# Altium PCB mainpcb.PcbDoc
Units mil, origin at the board's own origin, x right, y up, seen from the top; angles counter-clockwise.
Board outline 3937 x 1900 mil, 2 copper layers (Top Layer, Bottom Layer); 44 components, 53 nets, 370 pads, 5 vias.
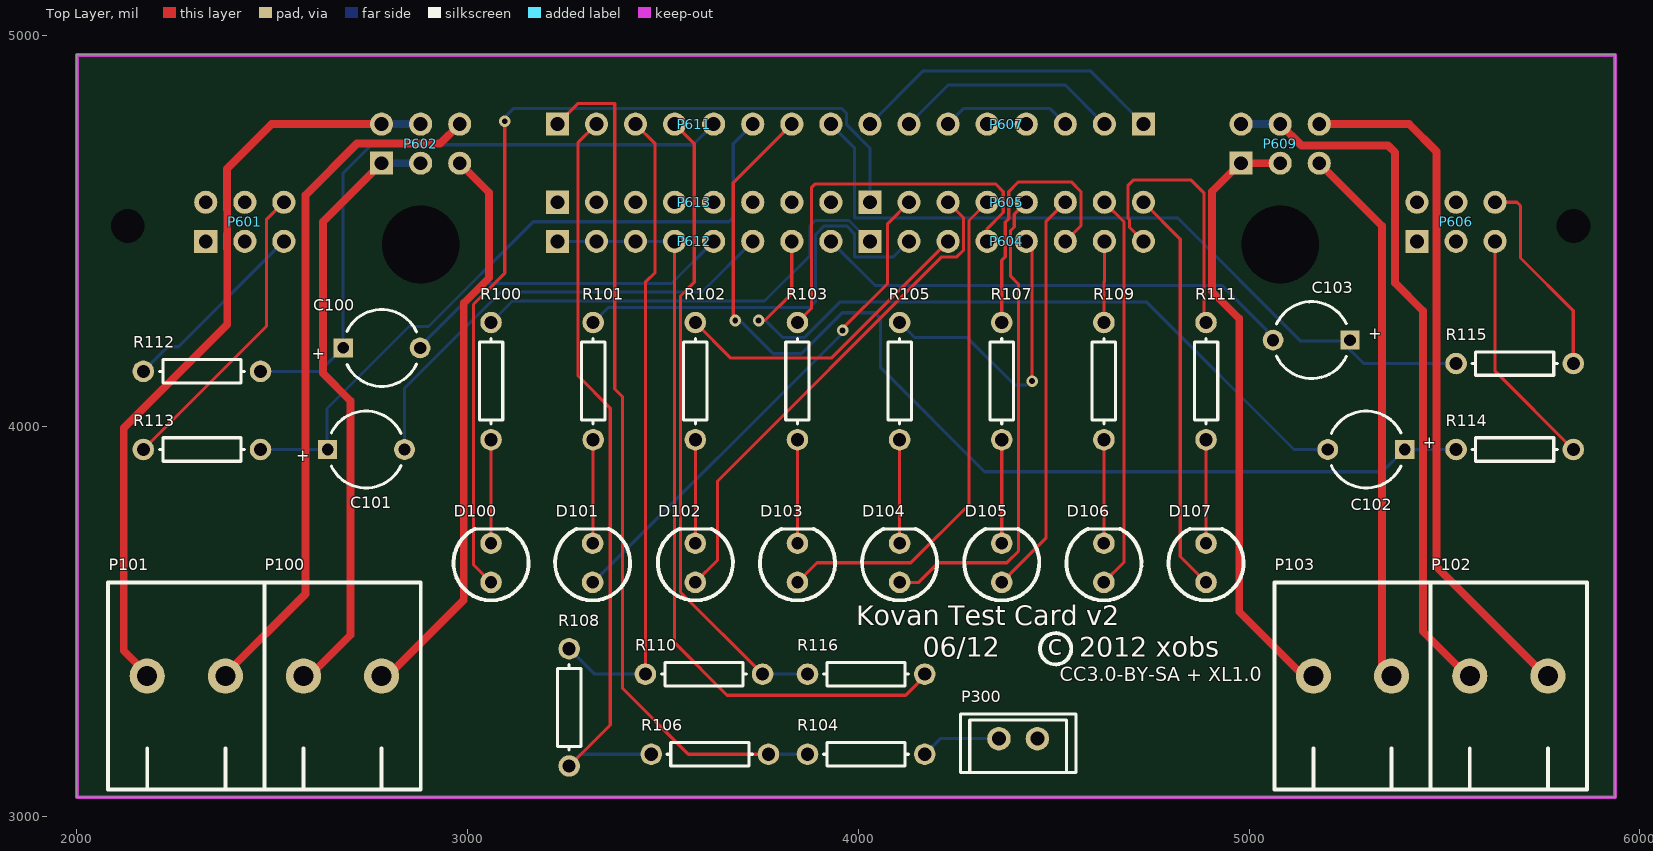
[diagram p0: Top Layer view]
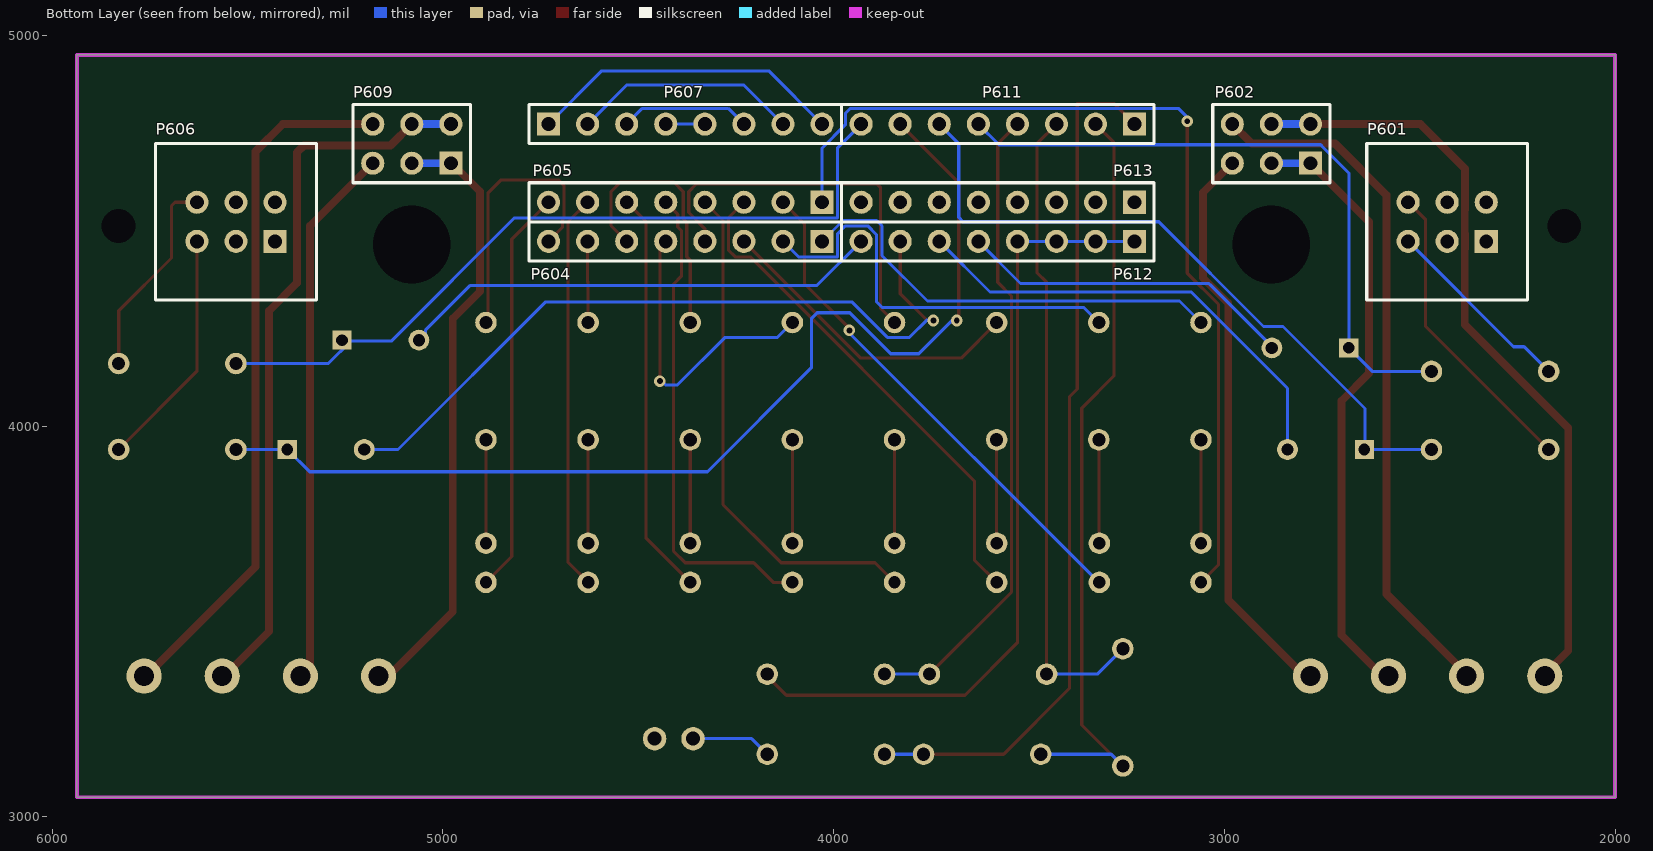
[diagram p1: Bottom Layer view, seen from below]

## Layer stack, top to bottom
Top Layer: signal copper 1.4
Dielectric: dielectric 12.6, FR-4, Dk 4.8
Bottom Layer: signal copper 1.4

## Board outline
2000,3050 5937,3050 5937,4950 2000,4950

## Design rules (kind name [scope] priority, off if disabled: settings)
Clearance [All] p1: gap=6
ComponentClearance [All] p1 off: gap=10 collisioncheckmode=3 verticalgap=10 showdistances=FALSE
HoleSize [All] p1: absolutevalues=TRUE maxlimit=300 minlimit=1 maxpercent=80.000 minpercent=20.000
PolygonConnect [All] p1: connectstyle=Relief reliefconductorwidth=10 reliefentries=4 polygonreliefangle="90 Angle"
RoomDefinition testboard [InComponentClass('testboard')] p1 off: confinementstyle=ConfineIn formatcopy=TRUE lockcomponents=FALSE outline 5980,3875 19270,3875 19270,3880 5980,3880
RoutingVias [All] p1: holewidth=15 width=30 viastyle="Through Hole" minholewidth=15 minwidth=30 maxholewidth=15 maxwidth=30
SilkscreenOverComponentPads [All] p1: minsilkscreentomaskgap=2
SolderMaskExpansion [All] p1: expansion=4
Width [All] p1: maxlimit=100 minlimit=6 preferedwidth=8
25 further rules are at their usual default settings.

## Components (designator, comment, footprint, x,y, rotation, side; value= is the part's Value field where it differs from the comment)
C100 "100uF" CAPPR5-5x5 2780,4200 r0 top
C101 "100uF" CAPPR5-5x5 2740,3940 r0 top
C102 "100uF" CAPPR5-5x5 5300,3940 r180 top
C103 "100uF" CAPPR5-5x5 5160,4220 r180 top
D100 "LED1" TLHG520 3060,3600 r90 top
D101 "LED1" TLHG520 3320,3600 r90 top
D102 "LED1" TLHG520 3582.86,3600 r90 top
D103 "LED1" TLHG520 3844.29,3600 r90 top
D104 "LED1" TLHG520 4105.71,3600 r90 top
D105 "LED1" TLHG520 4367.14,3600 r90 top
D106 "LED1" TLHG520 4628.57,3600 r90 top
D107 "LED1" TLHG520 4890,3600 r90 top
P100 "Motor 1" weidmuller_1716060000 2580,3360 r0 top
P101 "Motor 2" weidmuller_1716060000 2180,3360 r0 top
P102 "Motor 3" weidmuller_1716060000 5565,3360 r0 top
P103 "Motor 4" weidmuller_1716060000 5165,3360 r0 top
P300 "JST B2B-EH-A (Speaker)" JST_B2B_EH_A 4360,3200 r0 top
P601 "Fully Shrouded 3x2 header (Servo1)" HEADER2X3_SHROUDED 2329.8,4472.76 r0 top
P602 "3M 960206-6202-AR Header 3X2" HDR2X3 2779.8,4672.76 r0 top
P604 "Header 8 (VDD)" HDR1X8 4029.8,4472.76 r0 top
P605 "Header 8 (Ground 2)" HDR1X8 4029.8,4572.76 r0 top
P606 "Fully Shrouded 3x2 header (Servo2)" HEADER2X3_SHROUDED 5429.8,4472.76 r0 top
P607 "Header 8 (Digital)" HDR1X8 4729.8,4772.76 r180 top
P609 "3M 960206-6202-AR Header 3X2" HDR2X3 4979.8,4672.76 r0 top
P611 "Header 8 (Analog)" HDR1X8 3229.8,4772.76 r0 top
P612 "Header 8 (GND ANA)" HDR1X8 3229.8,4472.76 r0 top
P613 "Header 8 (VANA)" HDR1X8 3229.8,4572.76 r0 top
R100 "1K" AXIAL-0.3 3060,4115 r90 top
R101 "1K" AXIAL-0.3 3321.43,4115 r90 top
R102 "1K" AXIAL-0.3 3582.86,4115 r90 top
R103 "1K" AXIAL-0.3 3844.29,4115 r90 top
R104 "2.2K" AXIAL-0.3 4020,3160 r0 top
R105 "1K" AXIAL-0.3 4105.71,4115 r90 top
R106 "1K" AXIAL-0.3 3620,3160 r0 top
R107 "1K" AXIAL-0.3 4367.14,4115 r90 top
R108 "1K" AXIAL-0.3 3260,3280 r270 top
R109 "1K" AXIAL-0.3 4628.57,4115 r90 top
R110 "1K" AXIAL-0.3 3605,3365 r180 top
R111 "1K" AXIAL-0.3 4890,4115 r90 top
R112 "1K" AXIAL-0.3 2320,4140 r0 top
R113 "1K" AXIAL-0.3 2320,3940 r0 top
R114 "1K" AXIAL-0.3 5680,3940 r180 top
R115 "1K" AXIAL-0.3 5680,4160 r180 top
R116 "1.5K" AXIAL-0.3 4020,3365 r0 top

## Footprints (in the part's own frame and the unit in brackets; to place one, negate y for a bottom-side part, rotate by r counter-clockwise, add the part's x,y. Pads: shape width x height; smd on the part's side, far side on the other; paste and mask are expansions set on the pad)
AXIAL-0.3 [mm] "Axial Device, Thru-Hole; 2 Leads; 0.3 in Pin Spacing"
  round 1.4 hole 0.85: 1(-3.81,0) 2(3.81,0)
  silkscreen extent -2.77,-0.76 2.77,0.76
CAPPR5-5x5 [mm] "Capacitor, Electrolytic, Radial; Body 5 x 5 mm (Dia.xH typ); Pin Spacing 5 mm (typ)"
  rect 1.25x1.25 hole 0.75: 1(-2.5,0)
  round 1.35 hole 0.8: 2(2.5,0)
  silkscreen extent -2.26,-2.5 2.27,2.5
HDR1X8 [mm] "Connector; Header; 8 Position"
  rect 1.5x1.5 hole 0.9: 1(0,0)
  round 1.5 hole 0.9: 2(2.54,0) 3(5.08,0) 4(7.62,0) 5(10.16,0) 6(12.7,0) 7(15.24,0) 8(17.78,0)
HDR2X3 [mm] "Connector; Header; 3x2 Position"
  rect 1.5x1.5 hole 0.9: 1(0,0)
  round 1.5 hole 0.9: 2(0,2.54) 3(2.54,0) 4(2.54,2.54) 5(5.08,0) 6(5.08,2.54)
HEADER2X3_SHROUDED [mm] "2x3 0.1\" pin header, shrouded"
  rect 1.5x1.5 hole 0.9: 1(0,0)
  round 1.5 hole 0.9: 2(0,2.54) 3(2.54,0) 4(2.54,2.54) 5(5.08,0) 6(5.08,2.54)
JST_B2B_EH_A [mil] "2-pin 2.5mm low cost connector"
  round 60 hole 35.43: 1(0,0) 2(98.43,0)
  silkscreen extent -98,-87 197,63, body extent -98,-87 197,63, height 236
TLHG520 [mm]
  round 1.4 hole 0.8: 1(0,0) 2(2.54,0)
  silkscreen extent -1.17,-2.44 3.48,2.44
weidmuller_1716060000 [mil]
  round 90 hole 51.18: 1(0,0) 2(200,0)
  silkscreen extent -100,-290 300,240

## Part data
C100 C101 C102 C103: library part Cap, "Capacitor"
D100 D101 D102 D103 D104 D105 D106 D107: "Typical RED GaAs LED"
P100 P101 P102 P103 P300: library part "Header 2", "Header, 2-Pin"
P601 P602 P606 P609: library part "Header 3X2", "Header, 3-Pin, Dual row"
P604 P605 P607 P611 P612 P613: library part "Header 8", "Header, 8-Pin"
R100 R101 R102 R103 R104 R105 R106 R107 R108 R109 R110 R111 R112 R113 R114 R115 R116: library part Res1, "Resistor"

## Free pads (board coordinates)
  round 78.74 hole 86.61 unplated mask+59.06: 0(2130,4512.13) 0(5830.79,4512.13)
  round 55.12 hole 199 unplated: 0(2880,4465) 1(5080,4465)
  rect 100x2 on Top Overlay: 1(4726,3167) 1(4726,3169) 1(4726,3171) 1(4726,3173) 1(4726,3175) 1(4726,3177) 1(4726,3179) 1(4726,3181) 1(4726,3183) 1(4726,3185) 1(4726,3187) 1(4726,3189) 1(4730,3197) 1(4900,3197) 1(4904,3165) 1(4904,3167) 1(4904,3169) 1(4904,3171) 1(4904,3173) 1(4904,3181) 1(4904,3183) 1(4904,3185) 1(4904,3187) 1(4904,3189)
  rect 102x2 on Top Overlay: 1(4727,3161) 1(4727,3163) 1(4727,3165) 1(4727,3191) 1(4727,3193) 1(4729,3159) 1(4901,3159) 1(4903,3161) 1(4903,3163) 1(4903,3191) 1(4903,3193) 1(4903,3195)
  rect 104x2 on Top Overlay: 1(4728,3195)
  rect 4x2 on Top Overlay: 1(4730,3287) 1(4772,3081) 1(4858,3081) 1(4900,3287)
  rect 6x2 on Top Overlay: 1(4731,3069) 1(4899,3069)
  rect 10x2 on Top Overlay: 1(4731,3071) 1(4731,3285) 1(4771,3083) 1(4859,3083) 1(4899,3071) 1(4899,3285)
  rect 14x2 on Top Overlay: 1(4731,3283) 1(4769,3085) 1(4861,3085) 1(4899,3073) 1(4899,3283)
  rect 16x2 on Top Overlay: 1(4732,3073)
  rect 20x2 on Top Overlay: 1(4732,3075) 1(4732,3281) 1(4898,3075)
  rect 24x2 on Top Overlay: 1(4732,3279) 1(4898,3077) 1(4898,3279)
  rect 26x2 on Top Overlay: 1(4733,3077)
  rect 30x2 on Top Overlay: 1(4733,3079) 1(4733,3277) 1(4897,3079)
  rect 34x2 on Top Overlay: 1(4733,3081) 1(4733,3275) 1(4815,3317) 1(4897,3081) 1(4897,3275)
  rect 38x2 on Top Overlay: 1(4733,3273) 1(4815,3311) 1(4815,3313) 1(4815,3315) 1(4897,3273)
  rect 40x2 on Top Overlay: 1(4734,3083) 1(4816,3309) 1(4896,3083)
  rect 44x2 on Top Overlay: 1(4734,3085) 1(4734,3271) 1(4816,3297) 1(4896,3085) 1(4896,3271)
  rect 92x2 on Top Overlay: 1(4734,3157) 1(4866,3217) 1(4896,3157)
  rect 48x2 on Top Overlay: 1(4734,3269) 1(4816,3287) 1(4896,3269)
  rect 90x2 on Top Overlay: 1(4737,3199) 1(4765,3217) 1(4895,3199)
  rect 84x2 on Top Overlay: 1(4740,3155) 1(4760,3215) 1(4870,3215) 1(4890,3155)
  rect 72x2 on Top Overlay: 1(4742,3091) 1(4746,3101) 1(4748,3103) 1(4748,3105) 1(4748,3203) 1(4750,3107) 1(4750,3149) 1(4750,3151) 1(4750,3205) 1(4752,3207) 1(4758,3127) 1(4758,3129) 1(4872,3127) 1(4872,3129) 1(4880,3149) 1(4880,3205) 1(4882,3105) 1(4882,3151) 1(4882,3203) 1(4884,3101) 1(4888,3091)
  rect 76x2 on Top Overlay: 1(4742,3093) 1(4752,3147) 1(4754,3145) 1(4754,3211) 1(4758,3133) 1(4758,3135) 1(4872,3133) 1(4872,3135) 1(4876,3145) 1(4876,3211) 1(4888,3093)
  rect 80x2 on Top Overlay: 1(4742,3201) 1(4758,3137) 1(4758,3139) 1(4758,3141) 1(4872,3137) 1(4872,3139) 1(4874,3141) 1(4888,3201)
  rect 70x2 on Top Overlay: 1(4743,3089) 1(4751,3109) 1(4751,3111) 1(4753,3113) 1(4755,3117) 1(4875,3117) 1(4877,3113) 1(4879,3109) 1(4879,3111) 1(4881,3107) 1(4887,3089)
  rect 74x2 on Top Overlay: 1(4743,3095) 1(4745,3097) 1(4745,3099) 1(4747,3153) 1(4753,3209) 1(4759,3131) 1(4873,3131) 1(4877,3209) 1(4879,3147) 1(4879,3207) 1(4883,3103) 1(4883,3153) 1(4885,3099) 1(4887,3095) 1(4887,3097)
  rect 68x2 on Top Overlay: 1(4744,3087) 1(4754,3115) 1(4756,3119) 1(4758,3121) 1(4758,3123) 1(4758,3125) 1(4816,3275) 1(4872,3123) 1(4872,3125) 1(4874,3119) 1(4876,3115)
  rect 78x2 on Top Overlay: 1(4755,3143) 1(4757,3213) 1(4815,3273) 1(4873,3213) 1(4875,3143)
  rect 190x2 on Top Overlay: 1(4815,3219) 1(4815,3221) 1(4815,3239)
  rect 186x2 on Top Overlay: 1(4815,3223) 1(4815,3225) 1(4815,3237)
  rect 182x2 on Top Overlay: 1(4815,3227) 1(4815,3229) 1(4815,3231) 1(4815,3233)
  rect 194x2 on Top Overlay: 1(4815,3243)
  rect 198x2 on Top Overlay: 1(4815,3245)
  rect 202x2 on Top Overlay: 1(4815,3249)
  rect 206x2 on Top Overlay: 1(4815,3251)
  rect 210x2 on Top Overlay: 1(4815,3253) 1(4815,3255)
  rect 214x2 on Top Overlay: 1(4815,3257) 1(4815,3267)
  rect 218x2 on Top Overlay: 1(4815,3259) 1(4815,3261) 1(4815,3265)
  rect 222x2 on Top Overlay: 1(4815,3263)
  rect 98x2 on Top Overlay: 1(4815,3269) 1(4905,3175) 1(4905,3177) 1(4905,3179)
  rect 86x2 on Top Overlay: 1(4815,3271)
  rect 58x2 on Top Overlay: 1(4815,3277)
  rect 50x2 on Top Overlay: 1(4815,3279) 1(4815,3281) 1(4815,3283) 1(4815,3285)
  rect 46x2 on Top Overlay: 1(4815,3289) 1(4815,3291) 1(4815,3293) 1(4815,3295)
  rect 42x2 on Top Overlay: 1(4815,3299) 1(4815,3301) 1(4815,3303) 1(4815,3305) 1(4815,3307)
  rect 184x2 on Top Overlay: 1(4816,3235)
  rect 192x2 on Top Overlay: 1(4816,3241)
  rect 200x2 on Top Overlay: 1(4816,3247)
  rect 66x2 on Top Overlay: 1(4873,3121) 1(4887,3087)
  rect 28x2 on Top Overlay: 1(4898,3277)
  rect 18x2 on Top Overlay: 1(4899,3281)

## Via types
v1: diameter 30, hole 15, Top Layer to Bottom Layer, 5 vias

## Nets (pads, with @x,y where several pads share a name; then routed paths per layer and width w, separated by ;. In a path a pad name is that pad's centre, name@x,y a point inside that pad or via, vN(x,y) a via of type N, cw(c..) or ccw(c..) an arc to the next point about the centre after c; other vN are vias at no path point)
ANA_GND_4: C100.2 P612.5 | length 867.8
  Bottom Layer w8: C100.2@2875,4200 3035,4360 3040,4365 3522.05,4365 P612.5
ANA_GND_5: C101.2 P612.6 | length 1203.8
  Bottom Layer w8: C101.2 2838.43,4096.54 3084.88,4343 3600.05,4343 P612.6
ANA_GND_6: C102.2 P612.7 | length 1916.7
  Top Layer w8: v1(3745,4270) 3761,4270 3829.8,4338.8 P612.7
  Bottom Layer w8: v1(3745,4270) 3746,4271 3762,4271 3806,4227 3862.5,4227 3953.5,4318 4737,4318 5115,3940 C102.2
ANA_GND_7: C103.2 P612.8 | length 1234.5
  Bottom Layer w8: P612.8 4042.56,4360 4930,4360 5045,4245 C103.2@5045,4220
ANA_GND_SPK: P611.4 R110.1 R116.1 | length 1647.1
  Top Layer w8: P611.4 3580,4722.56 3580,4368 3545,4333 3545,3575 R110.1
  Bottom Layer w8: R110.1 3810,3365 3865,3365 R116.1@3870,3360
DLOOP0: P607.1 P607.8 | length 812.9
  Bottom Layer w8: P607.8 4166.05,4909 4593.56,4909 P607.1
DLOOP1: P607.2 P607.7 | length 583
  Bottom Layer w8: P607.7 4230.05,4873 4529.56,4873 P607.2
DLOOP2: P607.3 P607.6 | length 333.3
  Bottom Layer w8: P607.6 4270.05,4813 4489.56,4813 P607.3
DLOOP3: P607.4 P607.5 | length 100
  Bottom Layer w8: P607.5 P607.4
NetC100_2: C100.1 P611.5 R112.2 | length 1749.2
  Bottom Layer w8: R112.2 2621.57,4140 C100.1 2681.57,4647.72 2746.85,4713 2753.85,4720 3245,4720 ; 3180,4720 3245,4720 ; P611.5 3577.05,4720 3245,4720
NetC101_2: C101.1 P611.6 R113.2 | length 1776.9
  Bottom Layer w8: R113.2 2640,3940 2640,4045 2850,4255 2900,4255 3168,4523 3669,4523 3680,4534 3680,4722.95 P611.6
NetC102_2: C102.1 P611.7 R114.2 | length 2758.2
  Top Layer w8: v1(3685,4270) 3680,4275 3680,4622.95 P611.7
  Bottom Layer w8: v1(3685,4270) 3687,4272 3695,4272 3782,4185 3854,4185 3959,4290 4042,4290 4057,4275 4057,4149 4323,3883 5341.43,3883 C102.1 R114.2
NetC103_2: C103.1 P611.8 R115.2 | length 1963.6
  Bottom Layer w8: P611.8 3990,4712.56 3990,4534 3991,4533 4817,4533 5132.5,4217.5 5235.93,4217.5 5293.43,4160 5300,4160 5320,4160 ; 5315,4160 5320,4160 ; R115.2 5320,4160
NetD100_1: D100.2 R100.1 | length 265
  Top Layer w8: D100.2 R100.1
NetD100_2: D100.1 P605.1 | length 2397.8
  Top Layer w8: D100.1 3015,3645 3015,4311.45 3095,4391.45 3095,4644 3095,4770 3085,4780 v1(3095,4780)
  Bottom Layer w8: v1(3095,4780) 3095,4790 3118,4813 3957,4813 3970,4800 3970,4771 4029.8,4711.2 P605.1
NetD101_1: D101.2 R101.1 | length 265
  Top Layer w8: D101.2@3321.43,3700 R101.1
NetD101_2: D101.1 P605.2 | length 1312.2
  Top Layer w8: v1(3960,4245) 3960,4250 4075,4365 4075,4517.95 P605.2
  Bottom Layer w8: D101.1@3321.43,3600 3963.57,4242.14 3963.57,4244.28 3962.86,4245 v1(3960,4245)
NetD102_1: D102.2 R102.1 | length 265
  Top Layer w8: D102.2 R102.1
NetD102_2: D102.1 P605.3 | length 1296.2
  Top Layer w8: D102.1 3640,3657.14 3640,3859.5 4213.5,4433 4252.33,4433 4269.33,4450 4269.33,4533.23 P605.3
NetD103_1: D103.2 R103.1 | length 265
  Top Layer w8: D103.2 R103.1
NetD103_2: D103.1 P605.4 | length 1314.6
  Top Layer w8: D103.1 3894.29,3650 4134.5,3650 4283.33,3798.83 4283.33,4526.28 P605.4
NetD104_1: D104.2 R105.1 | length 265
  Top Layer w8: D104.2 R105.1
NetD105_1: D105.2 R107.1 | length 265
  Top Layer w8: D105.2 R107.1
NetD105_2: D105.1 P605.6 | length 1040.1
  Top Layer w8: D105.1 4480,3712.86 4480,4522.95 P605.6
NetD106_1: D106.2 R109.1 | length 265
  Top Layer w8: D106.2 R109.1
NetD106_2: D106.1 P605.7 | length 1014.9
  Top Layer w8: D106.1 4680,3651.43 4680,4522.56 P605.7
NetD107_1: D107.2 R111.1 | length 265
  Top Layer w8: D107.2 R111.1
NetD107_2: D107.1 P605.8 | length 1039.1
  Top Layer w8: P605.8 4824,4478.56 4824,3700 4824,3666 D107.1
NetP100_1: P100.1 P602.1 P602.3 | length 1540.2
  Top Layer w20: P100.1@2600,3365 2700,3465 2700,4065 2630,4135 2630,4522.95 P602.1
  Bottom Layer w20: P602.1 P602.3
NetP100_2: P100.2 P602.5 | length 1444.5
  Top Layer w20: P100.2@2800,3365 2990,3555 2990,4314.73 3055,4379.73 3055,4597.56 P602.5
NetP101_1: P101.1 P602.2 P602.4 | length 1972
  Top Layer w20: P101.1@2180,3365 2120,3425 2120,3995 2385,4260 2385,4453.17 2384.28,4453.9 2384.28,4491.61 2385,4492.34 2385,4553.17 2384.28,4553.9 2384.28,4658.78 2498.26,4772.76 P602.2
  Bottom Layer w20: P602.2 P602.4
NetP101_2: P101.2 P602.6 | length 1781
  Top Layer w20: P101.2@2380,3365 2585,3570 2585,4591 2717,4723 2930.05,4723 P602.6
NetP102_1: P102.1 P609.2 P609.4 | length 1841.4
  Top Layer w20: P609.4 5134.28,4718.28 5160.95,4718.28 5355.72,4718.28 5374,4700 5374,4366 5445,4295 5445,3475 P102.1@5560,3360
  Bottom Layer w20: P609.2 P609.4
NetP102_2: P102.2 P609.6 | length 1787.9
  Top Layer w20: P609.6 5410,4772.76 5480,4702.76 5480,3640 P102.2@5760,3360
NetP103_1: P103.1 P609.1 P609.3 | length 1642.3
  Top Layer w20: P609.3 4977.76,4672.76 4905,4600 4905,4345 4975,4275 4975,3525 P103.1@5140,3360
  Bottom Layer w20: P609.1 P609.3
NetP103_2: P103.2 P609.5 | length 1379.1
  Top Layer w20: P609.5 5340,4512.56 P103.2@5340,3360
NetP604_1: P604.1 R100.2 | length 1144.9
  Bottom Layer w8: R100.2 3115,4320 3760,4320 3876.28,4436.28 3876.28,4512.5 3890.06,4526.28 3976.28,4526.28 P604.1
NetP604_2: P604.2 R101.2 | length 1094.9
  Bottom Layer w8: R101.2 3359.43,4303 3875,4303 3890.28,4318.28 3890.28,4490.06 3912.5,4512.28 3970,4512.28 3990,4492.28 3990,4434 3991,4433 4090.05,4433 P604.2
NetP604_3: P604.3 R102.2 | length 808.4
  Top Layer w8: R102.2 3673.86,4174 3931.05,4174 P604.3
NetP604_4: P604.4 R103.2 | length 1007.5
  Top Layer w8: R103.2 3880,4300.71 3880,4610 3890,4620 4351,4620 4371,4600 4371,4546.45 4329.8,4505.26 P604.4
NetP604_5: P604.5 R105.2 | length 764.7
  Top Layer w8: v1(4445,4115) P604.5@4445,4470
  Bottom Layer w8: R105.2 4143.71,4227 4278,4227 4400,4105 4430,4105 4440,4115 v1(4445,4115)
NetP604_6: P604.6 R107.2 | length 692
  Top Layer w8: R107.2 4367.14,4424.14 4376,4433 4376,4522 4385,4531 4385,4600 4410,4625 4545,4625 4570,4600 4570,4512.95 P604.6
NetP604_7: P604.7 R109.2 | length 208.3
  Top Layer w8: R109.2 4628.57,4368 4629.8,4369.23 P604.7
NetP604_8: P604.8 R111.2 | length 707.1
  Top Layer w8: P604.8 4694,4508.56 4694,4528.36 4690,4532.36 4690,4615 4705,4630 4851,4630 4885,4596 4885,4270 R111.2
NetP611_1: P611.1 R104.1 R106.2 | length 2217.8
  Top Layer w8: P611.1 3283.05,4826 3376.5,4826 3376.5,4095 3396.5,4075 3396.5,3328.5 3565,3160 R106.2
  Bottom Layer w8: R106.2 R104.1
NetP611_2: P611.2 R106.1 R108.2 | length 1962
  Top Layer w8: R108.2 3365,3235 3365,4046 3283,4128 3283,4725.95 P611.2
  Bottom Layer w8: R108.2 3290,3160 R106.1
NetP611_3: P611.3 R108.1 R110.2 | length 1660.8
  Top Layer w8: P611.3 3480,4722.56 3480,4393 3455,4368 R110.2
  Bottom Layer w8: R108.1 3325,3365 R110.2
NetP612_1: P612.1 P612.2 P612.3 P612.4 R116.2 | length 2043.6
  Top Layer w8: P612.4 3529.8,3445.2 3664,3311 4121,3311 R116.2@4170,3360
  Bottom Layer w8: P612.1 P612.2 P612.3 P612.4
SPEAKER_IN: P300.1 R104.2 | length 206.6
  Bottom Layer w8: R104.2 4210,3200 P300.1
SRV_TST_0: P601.5 R112.1 | length 497.6
  Bottom Layer w8: R112.1 2233,4203 2260.05,4203 P601.5
SRV_TST_1: P601.6 R113.1 | length 781.8
  Top Layer w8: R113.1 2485,4255 2485,4527.95 P601.6
SRV_TST_2: P606.5 R114.1 | length 615.7
  Top Layer w8: P606.5 5629.8,4140.2 R114.1
SRV_TST_3: P606.6 R115.1 | length 528.4
  Top Layer w8: P606.6 5685.7,4572.76 5695,4563.46 5695,4430 5830,4295 R115.1
pads on no net: D104.1 P300.2 P601.1 P601.2 P601.3 P601.4 P605.5 P606.1 P606.2 P606.3 P606.4 P613.1 P613.2 P613.3 P613.4 P613.5 P613.6 P613.7 P613.8
copper on no net: | length 1260.7
  Top Layer w8: 4100,3600 4155,3600 4205,3650 4380,3650 4410,3680 4410,4363 4390,4383 4390,4500.45 4399,4509.45 4399,4541.95 4429.8,4572.76

## Keep-outs
Keep-Out Layer:
  the board outline again, w10

## Silkscreen, mask and mechanical layers (free items; w line width, h text height)
Top Overlay:
  circle w10: c4505,3430 r40
  text "Kovan Test Card v2" at 3995,3490 h50
  text "c" at 4485,3415 h50
  text "06/12" at 4165,3410 h50
  text "2012 xobs" at 4565,3410 h50
  text "CC3.0-BY-SA + XL1.0" at 4515,3335 h60
Top Solder:
  the board outline again, w10
Drill Drawing:
  text ".LEGEND" at 6137,3200 h30
  text "Drill Drawing." at 6137,3100 h30

## Dimensions
2000,3050 to 5937,3050 on Mechanical 1
2000,3050 to 2000,4950 on Mechanical 1

## Text inside footprints (layer, text, board x,y; h text height)
C100: Top Overlay "+" at 2600.87,4170.47 h30
C101: Top Overlay "+" at 2560.87,3910.47 h30
C102: Top Overlay "+" at 5479.13,3969.53 h30 r180
C103: Top Overlay "+" at 5339.13,4249.53 h30 r180